# EAGLE board 808sn (EAGLE 7.1.0)
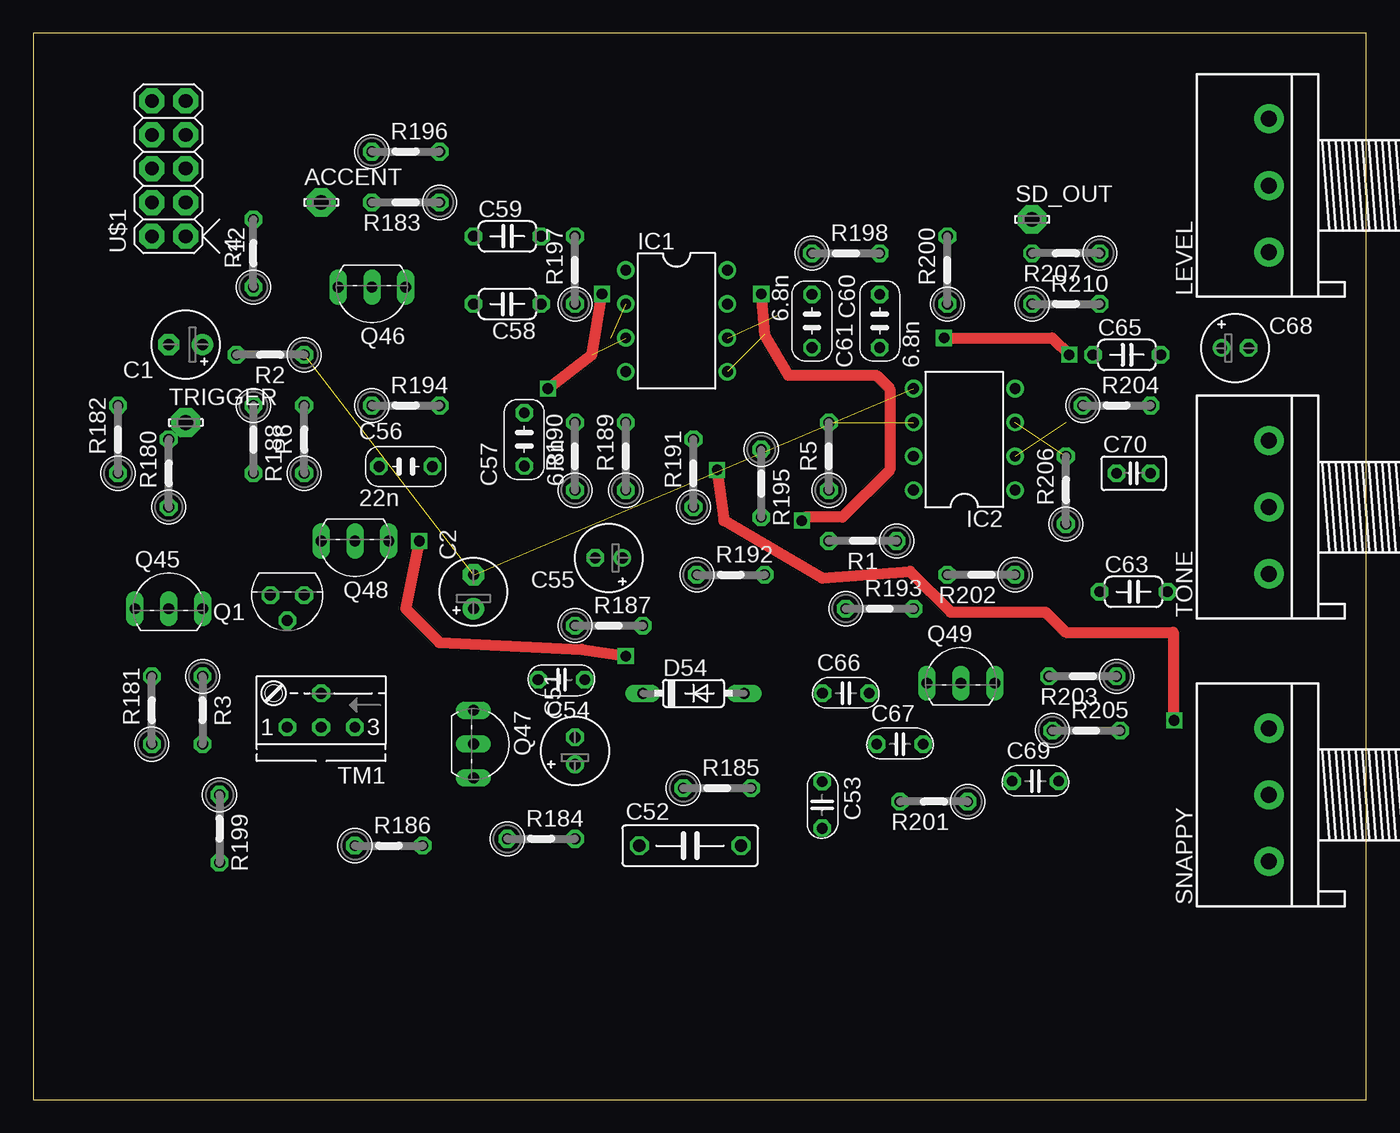
[diagram p0: board, top side]
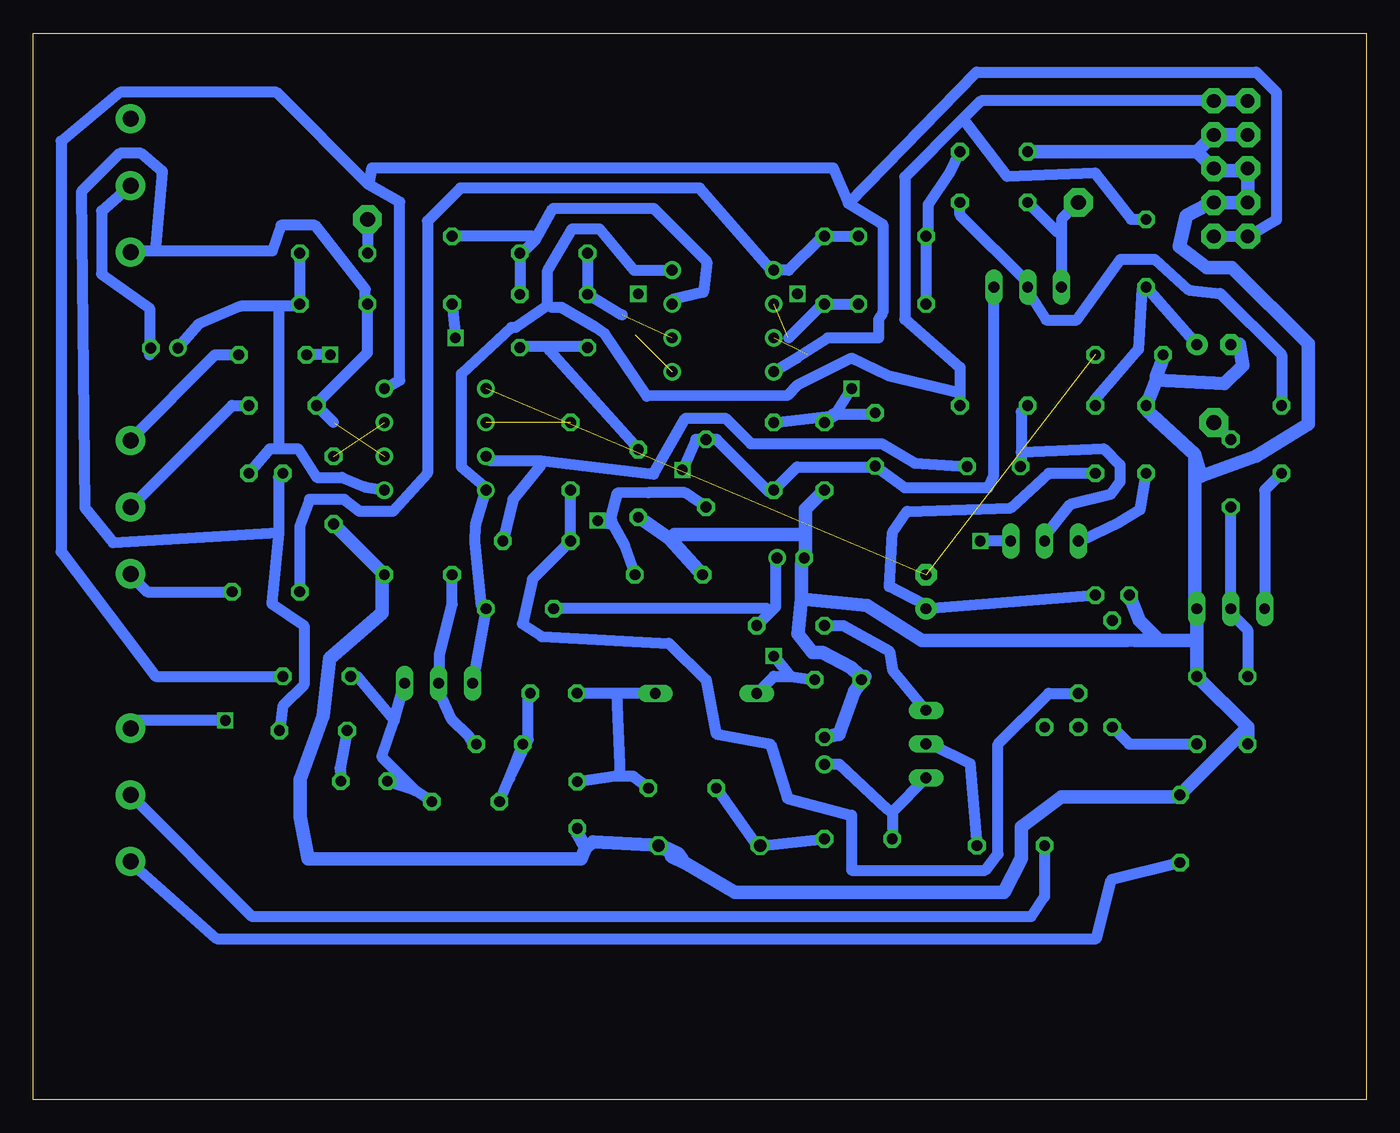
[diagram p1: board, bottom side, seen from below]

Size 100 x 80 mm. Coordinates in mm from the lower left corner, seen from the top.
Outline: 0,0 100,0 100,80 0,80 0,0
Copper layers (1*16): Top 0.035mm / dielectric 1.5mm / Bottom 0.035mm
Design rules "default *": minimum track width 32mil, minimum drill 24mil, track to track 16mil, track to pad 16mil, pad to pad 16mil, via to via 16mil, smd to smd 8mil, copper to edge 20mil, drill to drill 8mil, minimum pad ring 10mil, minimum via ring 8mil, stop-mask expansion 4mil, vias tented up to drill 0mil, thermal gap 10mil
Net classes: 0 default: width 0.635 mm, drill 0.254 mm, clearance 0.254 mm; 1 GND: width 1.016 mm, drill 1.016 mm, clearance 0.508 mm; 2 Power: width 1.016 mm, drill 1.016 mm, clearance 0.508 mm; 3 special: width 0.635 mm, drill 0.254 mm, clearance 0.254 mm; 4 15v: width 1.524 mm, drill 1.016 mm, clearance 0.508 mm

## Footprints (pad centres in the part's own frame; a part is rotated, then mirrored left to right if it is on the bottom)
LSP11 = drill 1.118 pad 2.159 octagon: MP 0,0
E2,5-5 = drill 0.813 pad 1.6: + -1.27,0 | drill 0.813 pad 1.6 octagon: - 1.27,0
E2-5 = drill 0.813 pad 1.27: + -1.016,0 | drill 0.813 pad 1.27 octagon: - 1.016,0
C075-032X103 = drill 0.914 octagon: 1 -3.81,0; 2 3.81,0
C035-025X75 = drill 0.8 octagon: P$1 -1.75,0; P$2 1.75,0
C035-030X60 = drill 0.8 octagon: P$1 -2,0; P$2 2,0
C050-024X044 = drill 0.813 octagon: 1 -2.54,0; 2 2.54,0
C025-025X050 = drill 0.813 octagon: 1 -1.27,0; 2 1.27,0
DO35-7 = drill 0.813 long: A 3.81,0; C -3.81,0
DIL08 = drill 0.813 pad 1.27: 1 -3.81,-3.81; 2 -1.27,-3.81; 3 1.27,-3.81; 4 3.81,-3.81; 5 3.81,3.81; 6 1.27,3.81; 7 -1.27,3.81; 8 -3.81,3.81
3RP/1610N = drill 1.2 pad 2.184: 1 -5,0; 2 0,0; 3 5,0
TO92 = drill 0.813 octagon: 1 1.27,0; 2 0,1.905; 3 -1.27,0
TO92-EBC = drill 0.813 long: B 0,-1.27; C -2.54,-1.27; E 2.54,-1.27
0207/5V = drill 0.813 octagon: 1 -2.54,0; 2 2.54,0
S64YW = drill 0.813 octagon: A 2.54,1.27; E -2.54,1.27; S 0,-1.27; S@1 0,1.27
POWER_10 = drill 1.016 pad 1.88 octagon: 1 -5.08,-1.27; 2 -5.08,1.27; 3 -2.54,-1.27; 4 -2.54,1.27; 5 0,-1.27; 6 0,1.27; 7 2.54,-1.27; 8 2.54,1.27; 9 5.08,-1.27; 10 5.08,1.27

## Placement (x,y rotation side)
ACCENT  LSP11  [LSP11]  21.59,67.31 0 top
C1  47/16  [E2,5-5]  11.43,56.64 180 top
C2  1/50  [E2,5-5]  33.02,38.1 90 top
C51  .47/50  [E2-5]  40.64,26.16 90 top
C52  100n  [C075-032X103]  49.28,19.05 0 top
C53  1n  [C035-025X75]  59.18,22.1 270 top
C54  2.7n  [C035-025X75]  39.62,31.5 180 top
C55  47/16  [E2-5]  43.18,40.64 180 top
C56  22n  [C035-030X60]  27.94,47.5 0 top
C57  6.8n  [C035-030X60]  36.83,49.53 90 top
C58  27n  [C050-024X044]  35.56,59.69 180 top
C59  27n  [C050-024X044]  35.56,64.77 0 top
C60  6.8n  [C035-030X60]  58.42,58.42 270 top
C61  6.8n  [C035-030X60]  63.5,58.42 90 top
C63  47n  [C050-024X044]  82.55,38.1 0 top
C65  47n  [C050-024X044]  82.04,55.88 0 top
C66  1.8n  [C035-025X75]  60.96,30.48 0 top
C67  1.8n  [C035-025X75]  65.02,26.67 0 top
C68  33/6.3  [E2-5]  90.17,56.39 0 top
C69  10n  [C035-025X75]  75.18,23.88 0 top
C70  220p  [C025-025X050]  82.55,46.99 0 top
D54  1N4148DO35-7  [DO35-7]  49.53,30.48 0 top
IC1  TL072P  [DIL08]  48.26,58.42 270 top
IC2  TL072P  [DIL08]  69.85,49.53 90 top
LEVEL  100K(A)  [3RP/1610N]  92.71,68.58 90 top
Q1  2N3704  [TO92]  19.05,37.85 180 top
Q45  BC546A  [TO92-EBC]  10.16,38.1 0 top
Q46  BC556  [TO92-EBC]  25.4,59.69 180 top
Q47  BC546A  [TO92-EBC]  34.29,26.67 270 top
Q48  BC546A  [TO92-EBC]  24.13,40.64 180 top
Q49  BC546A  [TO92-EBC]  69.6,32.51 0 top
R1  1M  [0207/5V]  62.23,41.91 180 top
R2  300K  [0207/5V]  17.78,55.88 180 top
R3  4.7K  [0207/5V]  12.7,29.21 270 top
R4  100R  [0207/5V]  16.51,63.5 90 top
R5  330K  [0207/5V]  59.69,48.26 90 top
R6  1M  [0207/5V]  20.32,49.53 90 top
R180  22K  [0207/5V]  10.16,46.99 90 top
R181  10K  [0207/5V]  8.89,29.21 90 top
R182  10K  [0207/5V]  6.35,49.53 90 top
R183  4K7  [0207/5V]  27.94,67.31 180 top
R184  15K  [0207/5V]  38.1,19.56 0 top
R185  15K  [0207/5V]  51.31,23.37 0 top
R186  33K  [0207/5V]  26.67,19.05 0 top
R187  330  [0207/5V]  43.18,35.56 0 top
R188  100  [0207/5V]  16.51,49.53 270 top
R189  100K  [0207/5V]  44.45,48.26 90 top
R190  680  [0207/5V]  40.64,48.26 90 top
R191  8.2K  [0207/5V]  49.53,46.99 90 top
R192  220  [0207/5V]  52.32,39.37 0 top
R193  100  [0207/5V]  63.5,36.83 0 top
R194  2.2M  [0207/5V]  27.94,52.07 0 top
R195  2K2  [0207/5V]  54.61,46.23 270 top
R196  680  [0207/5V]  27.94,71.12 0 top
R197  820K  [0207/5V]  40.64,62.23 90 top
R198  1M  [0207/5V]  60.96,63.5 0 top
R199  1K  [0207/5V]  13.97,20.32 270 top
R200  47k  [0207/5V]  68.58,62.23 90 top
R201  22K  [0207/5V]  67.56,22.35 180 top
R202  47K  [0207/5V]  71.12,39.37 180 top
R203  22K  [0207/5V]  78.74,31.75 180 top
R204  100K  [0207/5V]  81.28,52.07 0 top
R205  27K  [0207/5V]  78.99,27.69 0 top
R206  47K  [0207/5V]  77.47,45.72 90 top
R207  1K  [0207/5V]  77.47,63.5 180 top
R210  470K  [0207/5V]  77.47,59.69 0 top
SD_OUT  LSP11  [LSP11]  74.93,66.04 0 top
SNAPPY  10K(B)  [3RP/1610N]  92.71,22.86 90 top
TM1  22KB  [S64YW]  21.59,29.21 180 top
TONE  100k  [3RP/1610N]  92.71,44.45 90 top
TRIGGER  LSP11  [LSP11]  11.43,50.8 0 top
U$1  POWER_SIMPLE10  [POWER_10]  10.16,69.85 90 top

## Library data of the parts
ACCENT SD_OUT TRIGGER = solpad
C1 C2 C51-C61 C63 C65-C70 D54 R1-R6 R180-R207 R210 = TR808clone
IC1 IC2 = linear
LEVEL SNAPPY TM1 TONE = pot
Q1 = transistor
Q45 Q47-Q49 = transistor-npn
Q46 = transistor-pnp
U$1 = eurorack

## Nets
+12V: IC1.8 IC2.8 Q49.C R4.2 R193.2 R194.2 U$1.9 U$1.10
-12V: IC1.4 IC2.4 R203.1 U$1.1 U$1.2
GND [GND]: C1.- C51.- C52.2 C53.P$2 C54.P$2 C55.- Q1.1 Q45.E R2.2 R3.1 R181.1 R188.1 R190.1 R192.1 R195.2 R196.1 R199.1 R202.1 R206.1 U$1.3 U$1.4 U$1.5 U$1.6 U$1.7 U$1.8
N$1: IC2.3 R206.2
N$2: C2.- IC2.5 R2.1
N$3: IC2.6 R5.2
N$5: Q45.B R180.1 R181.2
N$6: Q46.B R182.2 R183.1
N$7: Q45.C R182.1
N$8: C57.P$2 IC1.3 R189.2 R190.2
N$9: C57.P$1 Q46.C R189.1 R191.2 SNAPPY.3
N$11: C58.1 IC1.2 R197.1
N$12: C59.2 C63.1 IC1.1 R197.2
N$13: C58.2 C59.1 R196.2
N$14: C61.P$2 IC1.7 R198.2 R200.2
N$15: C60.P$2 C61.P$1 R195.1
N$16: IC1.5 R191.1 R192.2
N$17: C63.2 TONE.1
N$18: C65.2 TONE.3
N$19: C65.1 R200.1
N$20: R199.2 SNAPPY.1
N$21: C52.1 R184.2 R185.1
N$22: R186.1 SNAPPY.2
N$23: Q47.B R186.2
N$24: Q47.C R187.1
N$25: C55.+ R187.2 R193.1
N$26: C51.+ Q47.E R184.1
N$27: C53.P$1 C66.P$1 D54.A R185.2
N$28: C66.P$2 C67.P$1 R201.2
N$29: C67.P$2 Q49.B R202.2
N$30: C69.P$1 Q49.E R201.1 R203.2
N$31: Q48.E R188.2
N$32: C54.P$1 D54.C Q48.C
N$33: C56.P$1 Q48.B R194.1
N$34: R204.2 TONE.2
N$35: C70.1 IC2.2 LEVEL.1 R204.1 R205.2 R210.1
N$36: C69.P$2 R205.1
N$129: C68.+ C70.2 IC2.1 R207.1 R210.2
N$159: C68.- LEVEL.2
N$160: C60.P$1 IC1.6 R198.1
N$707: R1.2 R5.1 TM1.S
N$709: C2.+ Q1.3 R6.1
N$710: C1.+ R4.1 R6.2
N$711: R3.2 TM1.A
SD: R180.2 TRIGGER.MP
SD_OUT: R207.2 SD_OUT.MP
TRIG: ACCENT.MP Q46.E R183.2
WN: C56.P$2 IC2.7 R1.1

## Tracks (layer width: path | path; a pad name or v marks a point on that pad's centre or on a via)
+12V
  Bottom 0.813: Q49.C R193.2 66.36,36.99 66.86,41.78 66.8,43.12 IC2.8 66.2,46.04 67.88,47.47 67.88,54.45 64.14,57.94 63.82,57.94 61.4,59.59 | IC1.8 54.93,62.23 57.53,65.34 59.56,65.34 61.4,62.23 61.4,59.59 | 30.48,53.02 30.48,54.93 34.61,58.55 34.61,69.22 30.24,73.58 | 30.48,53.02 R194.2 | 30.24,73.58 28.89,74.93 U$1.9 U$1.10 | R4.2 17.62,66.04 20.35,69.53 26.96,69.28 30.24,73.58 | 30.48,53.02 35.81,54.29 38.61,55.63 42.67,53.59 43.43,52.83 53.98,52.77 57.12,57.44 57.85,57.94 60.36,59.44 61.09,59.44 61.4,59.59
-12V
  Bottom 0.813: U$1.1 U$1.2 8.57,64.93 6.73,66.01 6.73,75.56 8.26,77.09 29.24,77.09 38.85,67.23 | R203.1 90.84,31.75 97.92,41.12 97.92,71.91 93.5,75.56 81.76,75.56 74.85,68.66 | 74.85,68.66 72.52,67.34 72.52,53.98 IC2.4 | IC1.4 42.74,55.63 40.39,57.15 36.58,57.15 36.58,58.55 36.26,59.05 36.26,65.66 38.85,67.23 | 38.85,67.23 40.01,69.91 74.61,69.91 74.85,68.66
GND
  Bottom 1.016: R206.1 R202.1 73.82,38.89 73.82,36.51 77.76,33.08 78.26,28.77 79.98,24 79.98,21.21 79.38,18.07 58.9,18.07 58.58,18.89 | C53.P$2 59.18,20.19 59.15,19.97 58.58,18.89 | 58.58,18.89 58.01,19.34 52.96,19.08 51.59,18.41 | 51.59,18.41 51.34,18.07 C52.2 | C51.- 39.56,27.43 39.56,27.4 38.39,30.61 37.62,31.75 C54.P$2 38.1,31.91 38.64,32.42 40.8,33.56 41.53,33.56 42.64,34.92 42.39,37.56 | 42.07,42.39 42.07,44.29 R190.1 | 42.07,42.39 42.07,40.64 C55.- 42.39,40.16 42.39,37.56 | R195.2 52.23,42.07 | 52.23,42.07 R192.1 | 42.07,42.39 51.91,42.39 52.23,42.07 | 12.7,71.12 R196.1 | 12.7,71.12 U$1.7 U$1.8 | 12.7,71.12 U$1.5 10.95,69.69 9.37,69.69 U$1.6 U$1.4 U$1.3 11.91,67.15 13.49,66.33 14,63.98 11.94,62.42 10.06,62.42 4.35,56.71 4.35,50.67 8.26,48.29 12.38,46.77 12.86,48.39 | 15.75,53.98 15.75,54.29 15.24,55.56 R2.2 | 15.75,53.98 R188.1 16.35,51.59 16.1,51.37 12.86,48.39 | C1.- 9.87,56.36 9.72,56.36 9.53,56.67 9.27,55.09 10.64,53.72 15.75,53.98 | 8.89,27.46 8.89,27.94 R3.1 12.7,34.45 | 8.89,27.46 R181.1 | 12.7,34.45 Q45.E 12.86,37.31 12.86,48.39 | 8.89,27.46 9.37,27.46 R199.1 14.45,22.7 22.86,22.7 25.88,20.45 25.88,18.1 27.18,15.53 47.37,15.53 51.12,17.75 52.13,18.26 51.59,18.41 | Q1.1 17.02,35.94 15.59,34.51 | 15.59,34.51 17.3,34.45 12.7,34.45 | 42.39,37.56 37.47,37.05 33.34,34.45 17.94,34.45 15.59,34.51
N$1  (1 unrouted)
N$2  (2 unrouted)
N$3  (1 unrouted)
N$5
  Bottom 0.813: R181.2 8.89,35.24 10.16,36.51 Q45.B R180.1
N$6
  Bottom 0.813: R182.2 6.35,55.88 10.95,60.48 13.3,60.74 15.88,63.06 18.41,63.06 21.72,58.48 24,58.48 25.4,60.64 Q46.B 25.4,61.28 30.48,66.36 R183.1
N$7
  Bottom 0.813: Q45.C 7.62,45.72 R182.1
N$8  (via drill 0.8)  (1 unrouted)
  Top 0.813: v38.61,53.34 41.91,55.88 v42.67,60.45
  Bottom 0.813: C57.P$2 36.83,51.44 40.01,51.44 R190.2 39.88,51.31 | R189.2 39.88,51.31 | 39.88,51.31 v38.61,53.34
N$9  (via drill 0.8)
  Top 0.813: v51.31,47.24 51.82,43.43 59.18,39.12 65.79,39.62 68.83,36.58 75.95,36.58 77.47,35.05 85.52,35.05 85.52,28.53 v85.6,28.45
  Bottom 0.813: Q46.C 27.94,46.83 28.35,45.91 34.61,45.91 36.51,47.31 C57.P$1 36.83,47.47 42.7,47.47 R189.1 44.77,45.56 48.74,49.53 R191.2 50.29,49.53 v51.31,47.24 | v85.6,28.45 92.12,28.45 SNAPPY.3
N$11  (1 unrouted)
  Bottom 0.813: C58.1 R197.1 40.96,59.53 43.34,57.15
N$12
  Bottom 0.813: C59.2 R197.2 40.96,64.61 43.34,62.23 IC1.1 44.77,62.39 50.01,68.39 67.94,68.39 70.42,65.91 70.42,46.99 73.03,44.13 75.53,44.13 76.68,45.02 79.28,45.02 80.01,43.02 C63.1
N$13
  Bottom 0.813: C58.2 C59.1 32.86,65.09 32.86,67.15 31.24,69.53 R196.2
N$14
  Bottom 0.813: C61.P$2 R198.2 63.18,63.66 62.31,64.53 | IC1.7 52.07,60.01 49.72,60.58 49.47,62.87 53.47,66.86 60.99,66.86 62.31,64.53 | R200.2 62.55,64.77 62.31,64.53
N$15
  Bottom 0.813: 61.28,56.52 63.5,56.52 C61.P$1 | 61.28,56.52 58.42,56.52 C60.P$2 | R195.1 61.28,56.2 61.28,56.52
N$16  (via drill 0.8)  (1 unrouted)
  Top 0.813: v54.61,60.45 54.86,57.4 56.64,54.36 63.25,54.36 64.26,53.34 64.26,47.24 60.71,43.69 57.91,43.69 v57.66,43.43
  Bottom 0.813: R192.2 55.63,41.56 56.56,43.26 | 56.56,43.26 56.71,43.66 56.2,45.5 53.88,45.53 51.12,45.53 R191.1 | v57.66,43.43 56.64,43.18 56.56,43.26
N$17
  Bottom 0.813: C63.2 91.44,38.1 92.71,39.37 TONE.1
N$18
  Bottom 0.813: C65.2 86.36,55.88 92.71,49.53 TONE.3
N$19  (via drill 0.8)
  Top 0.813: v68.33,57.15 76.45,57.15 v77.72,55.88
  Bottom 0.813: R200.1 v68.33,57.15 | v77.72,55.88 C65.1
N$20
  Bottom 0.813: R199.2 19.11,16.51 20.26,12.06 86.23,12.06 92.71,17.78 SNAPPY.1
N$21
  Bottom 0.813: R185.1 45.72,19.05 C52.1 R184.2
N$22
  Bottom 0.813: R186.1 24.13,15.24 25.15,13.72 83.57,13.72 SNAPPY.2
N$23
  Bottom 0.813: R186.2 29.72,25.21 32.7,26.67 Q47.B
N$24
  Bottom 0.813: Q47.C 35.53,32.23 35.78,33.66 39.21,35.56 R187.1
N$25
  Bottom 0.813: R187.2 44.69,36.59 | 44.69,36.59 44.29,36.99 44.29,40.64 C55.+ | R193.1 44.93,36.83 44.69,36.59
N$26
  Bottom 0.813: 35.56,21.59 R184.1 | Q47.E 35.56,21.59 | C51.+ 39.53,25.15 35.88,21.75 35.56,21.59
N$27
  Bottom 0.813: D54.A 56.2,30.48 | 56.2,30.48 C66.P$1 | 55.94,24.26 54.99,24.26 R185.2 | 55.94,24.26 56.39,24.26 C53.P$1 | 55.94,24.26 56.2,30.48
N$28
  Bottom 0.813: R201.2 64.26,24.13 C67.P$1 64.14,24.45 62.87,26.99 62.87,30.48 C66.P$2
N$29
  Bottom 0.813: C67.P$2 66.77,26.42 67.02,26.64 67.37,27.3 68.64,28.57 69.53,30.48 Q49.B 69.66,30.73 69.53,32.13 69.53,33.4 68.58,37.15 R202.2
N$30
  Bottom 0.813: R201.1 71.37,23.18 | 71.37,23.18 C69.P$1 | 72.91,28.43 73.85,25.72 71.37,23.18 | 72.91,28.43 Q49.E | R203.2 75.72,31.75 72.91,28.43
N$31
  Bottom 0.813: R188.2 16.95,44.26 18.48,43.34 21.43,41.91 Q48.E
N$32  (via drill 0.8)
  Top 0.813: v28.96,41.91 27.94,36.83 30.48,34.29 41.15,33.78 v44.45,33.27
  Bottom 0.813: 43.18,31.75 44.45,31.75 D54.C | 43.18,31.75 C54.P$1 | Q48.C v28.96,41.91 | v44.45,33.27 43.18,31.75
N$33
  Bottom 0.813: 25.88,48.58 25.88,51.59 R194.1 | 25.88,48.58 25.88,47.5 C56.P$1 | Q48.B 24.13,42.23 22.23,44.64 19.18,45.4 18.48,46.35 18.48,47.62 19.68,48.83 25.88,48.58
N$34
  Bottom 0.813: R204.2 85.09,52.07 TONE.2
N$35  (1 unrouted)
  Bottom 0.813: R205.2 81.28,29.53 79.69,31.11 79.69,35.56 82.11,37.21 81.6,42.55 | 81.6,42.55 81.6,46.67 C70.1 | 77.47,50.8 R204.1 78.58,52.39 74.93,56.04 R210.1 75.09,60.01 75.09,60.8 78.87,65.6 81.41,65.6 82.07,63.66 90.81,63.66 | 90.81,63.66 92.71,63.66 LEVEL.1 | 81.6,42.55 94.01,41.78 96.14,44.42 96.39,68.1 93.5,70.99 91.92,70.99 90.3,69.63 90.81,63.66
N$36
  Bottom 0.813: R205.1 76.99,24.86 76.96,24.61 C69.P$2
N$129
  Bottom 0.813: IC2.1 75.12,45.97 76.83,46.67 78.74,46.67 80.14,48.83 81.6,48.83 | 81.6,48.83 82.23,48.83 C70.2 | R207.1 R210.2 80.33,59.53 81.6,59.53 | C68.+ 87.6,58.17 84.45,59.53 81.6,59.53 | 81.6,59.53 81.6,48.83
N$159
  Bottom 0.813: LEVEL.2 94.87,66.67 94.87,61.94 91.28,59.37 91.28,55.88 C68.-
N$160  (1 unrouted)
  Bottom 0.813: R198.1 C60.P$1 55.82,58.86
N$707
  Bottom 0.813: TM1.S 23.81,30.48 27.62,26.67 27.62,18.41 28.57,17.21 38.61,17.21 38.61,21.34 43.43,22.61 44.7,26.67 48.77,27.43 49.53,31.5 52.32,34.23 61.85,34.73 63.31,35.69 62.55,39.05 R1.2 R5.1
N$709
  Bottom 0.813: Q1.3 C2.+ 33.18,37.15 35.78,38.48 35.53,42.55 34.45,44.13 26.67,44.39 23.81,46.99 R6.1
N$710
  Bottom 0.813: C1.+ R4.1 16.83,60.8 17.08,56.29 20.32,52.55 R6.2
N$711
  Bottom 0.813: R3.2 17.78,26.67 TM1.A
SD
  Bottom 0.813: TRIGGER.MP R180.2
SD_OUT
  Bottom 0.813: SD_OUT.MP R207.2
TRIG
  Bottom 0.813: 22.86,65.09 22.86,66.04 ACCENT.MP | 22.86,65.09 Q46.E | R183.2 23.18,65.09 22.86,65.09
WN
  Bottom 0.813: C56.P$2 33.88,47.75 36.35,49.21 46.16,49.21 48.07,51.12 51.05,51.12 53.47,46.93 61.91,47.94 | 61.91,47.94 65.72,47.94 IC2.7 | R1.1 64.01,45.02 61.91,47.62 61.91,47.94